# Altium PCB Switcher.PcbDoc (part 3 of 3)
Units mm, origin at the board's own origin, x right, y up, seen from the top; angles counter-clockwise.
Board outline 152.4 x 101.6 mm, 2 copper layers (Top Layer, Bottom Layer); 59 components, 74 nets, 310 pads, 234 vias.
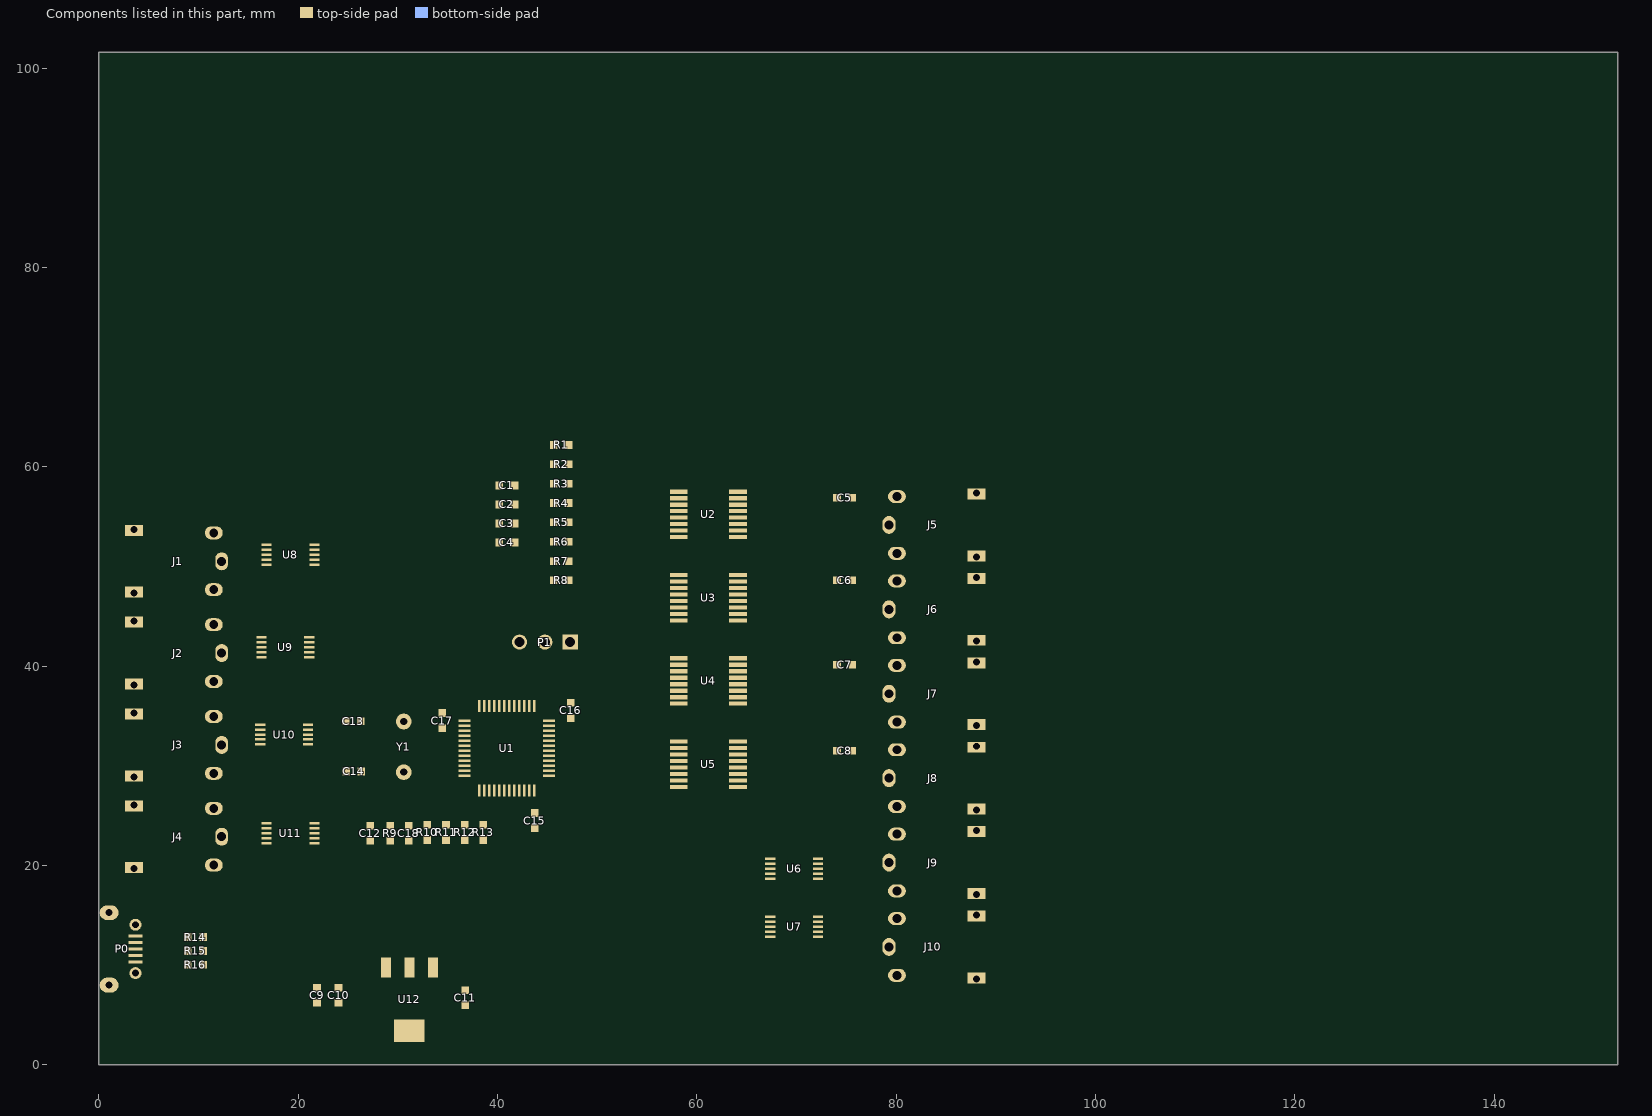
[diagram p3: the components of this part, seen from the top]

## Polygon pours and split planes (outlines as drawn) (continued)
GND on Top Layer "Bottom Layer-No Net" (solid, remove dead copper, pour order 7): 0,66 91.6,66 91.6,0 0,0

## Keep-outs
Keep-Out Layer:
  circle w0.254: c10.8,5 r2.5
  circle w0.254: c80.8,5 r2.5
  circle w0.254: c80.8,61 r2.5
  circle w0.254: c10.8,61 r2.5
  lines w0.2: 0,0 91.6,0 91.6,66 0,66 0,0